# Altium PCB R3I901.PcbDoc
Units mil, origin at the board's own origin, x right, y up, seen from the top; angles counter-clockwise.
Board outline 1978.5 x 1978.5 mil, 2 copper layers (Top Layer, Bottom Layer); 27 components, 25 nets, 102 pads, 31 vias.
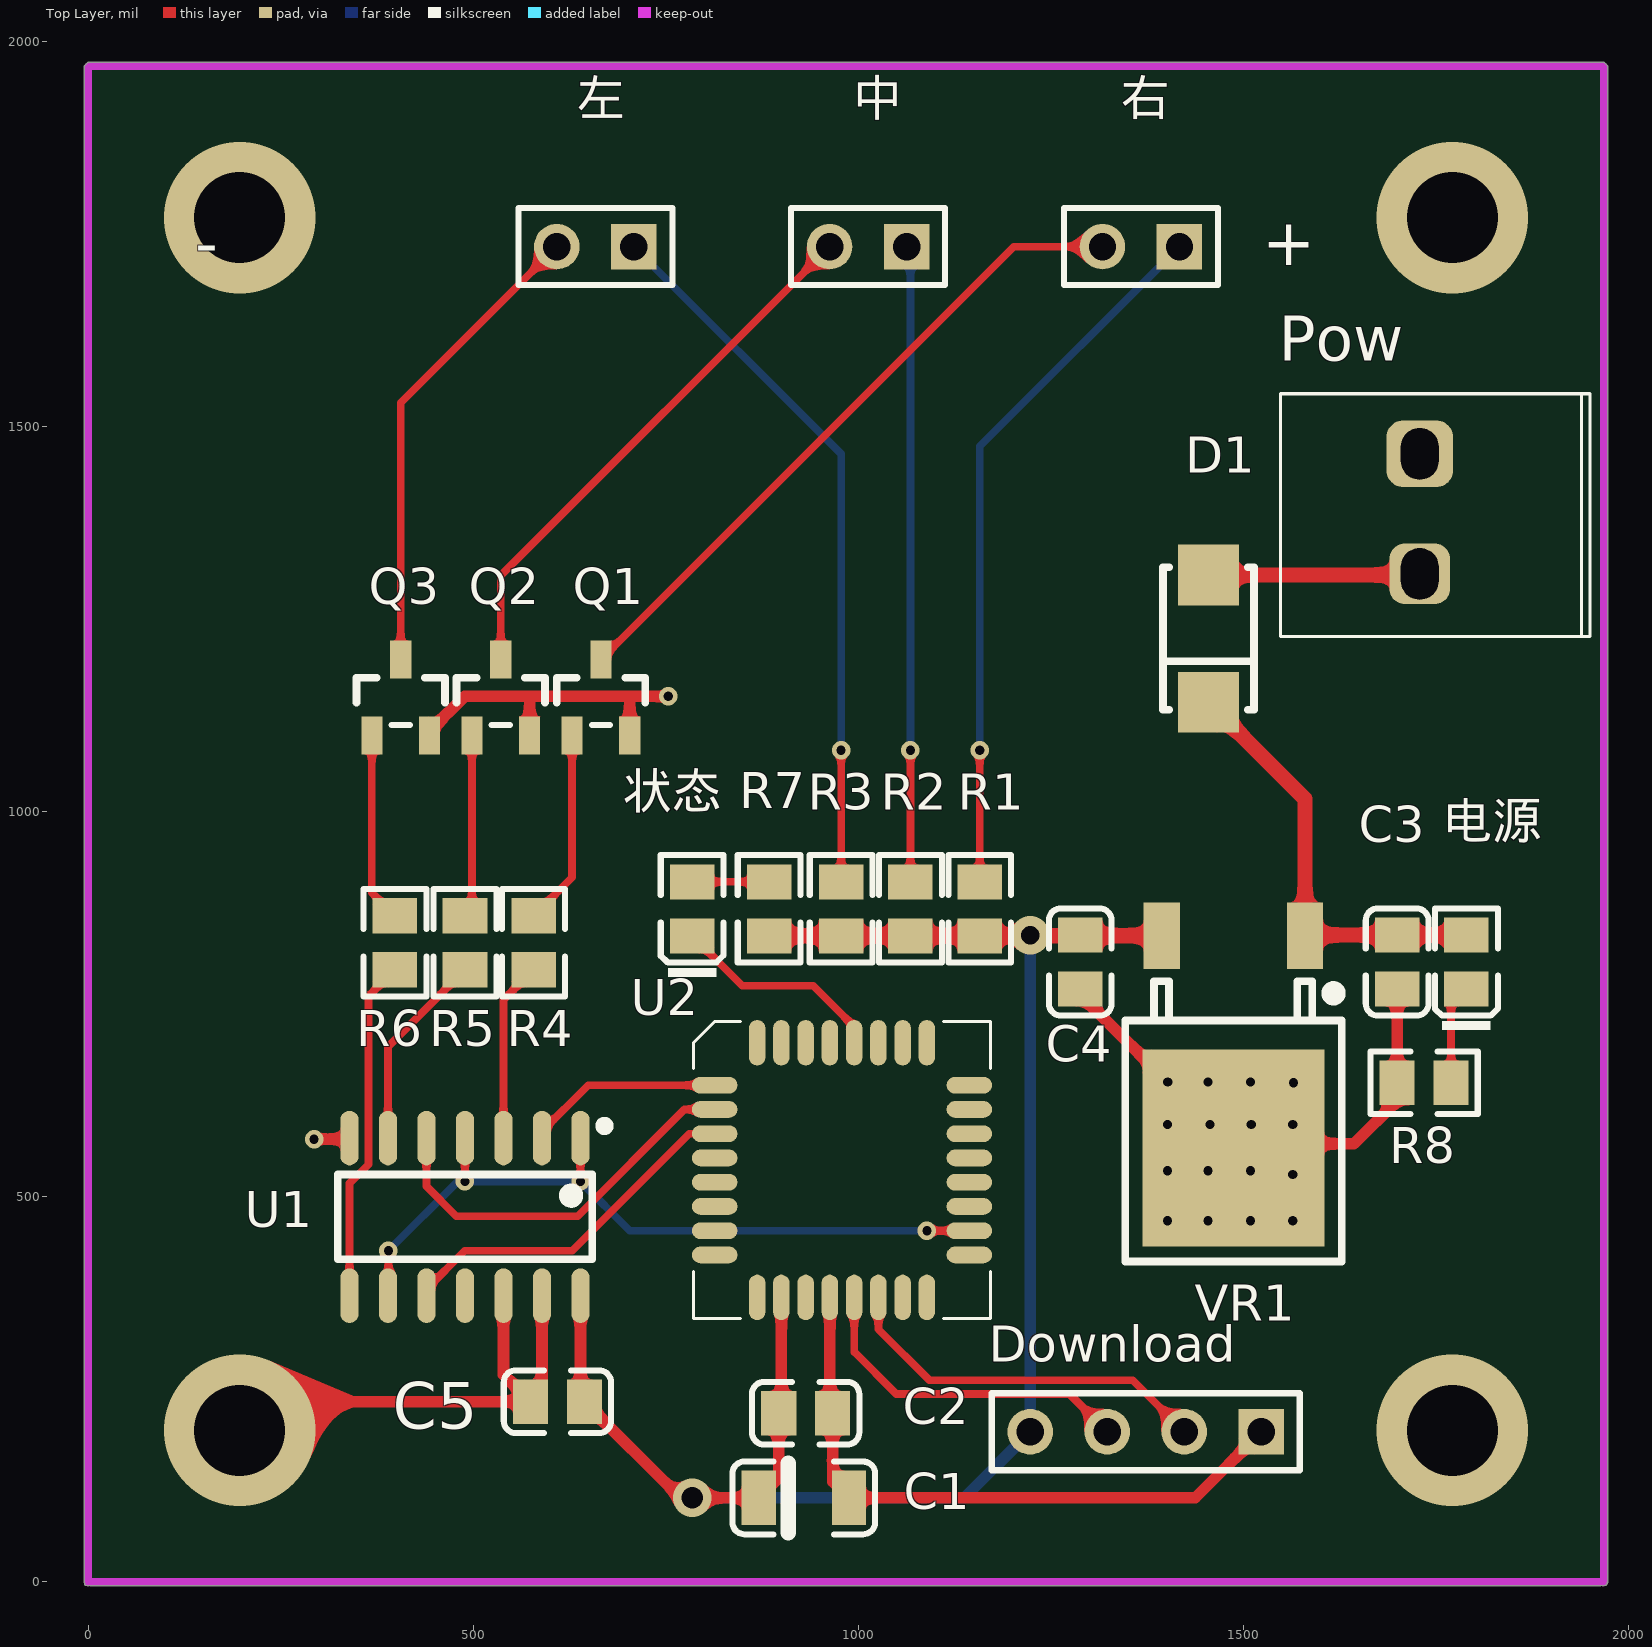
[diagram p0: Top Layer view]
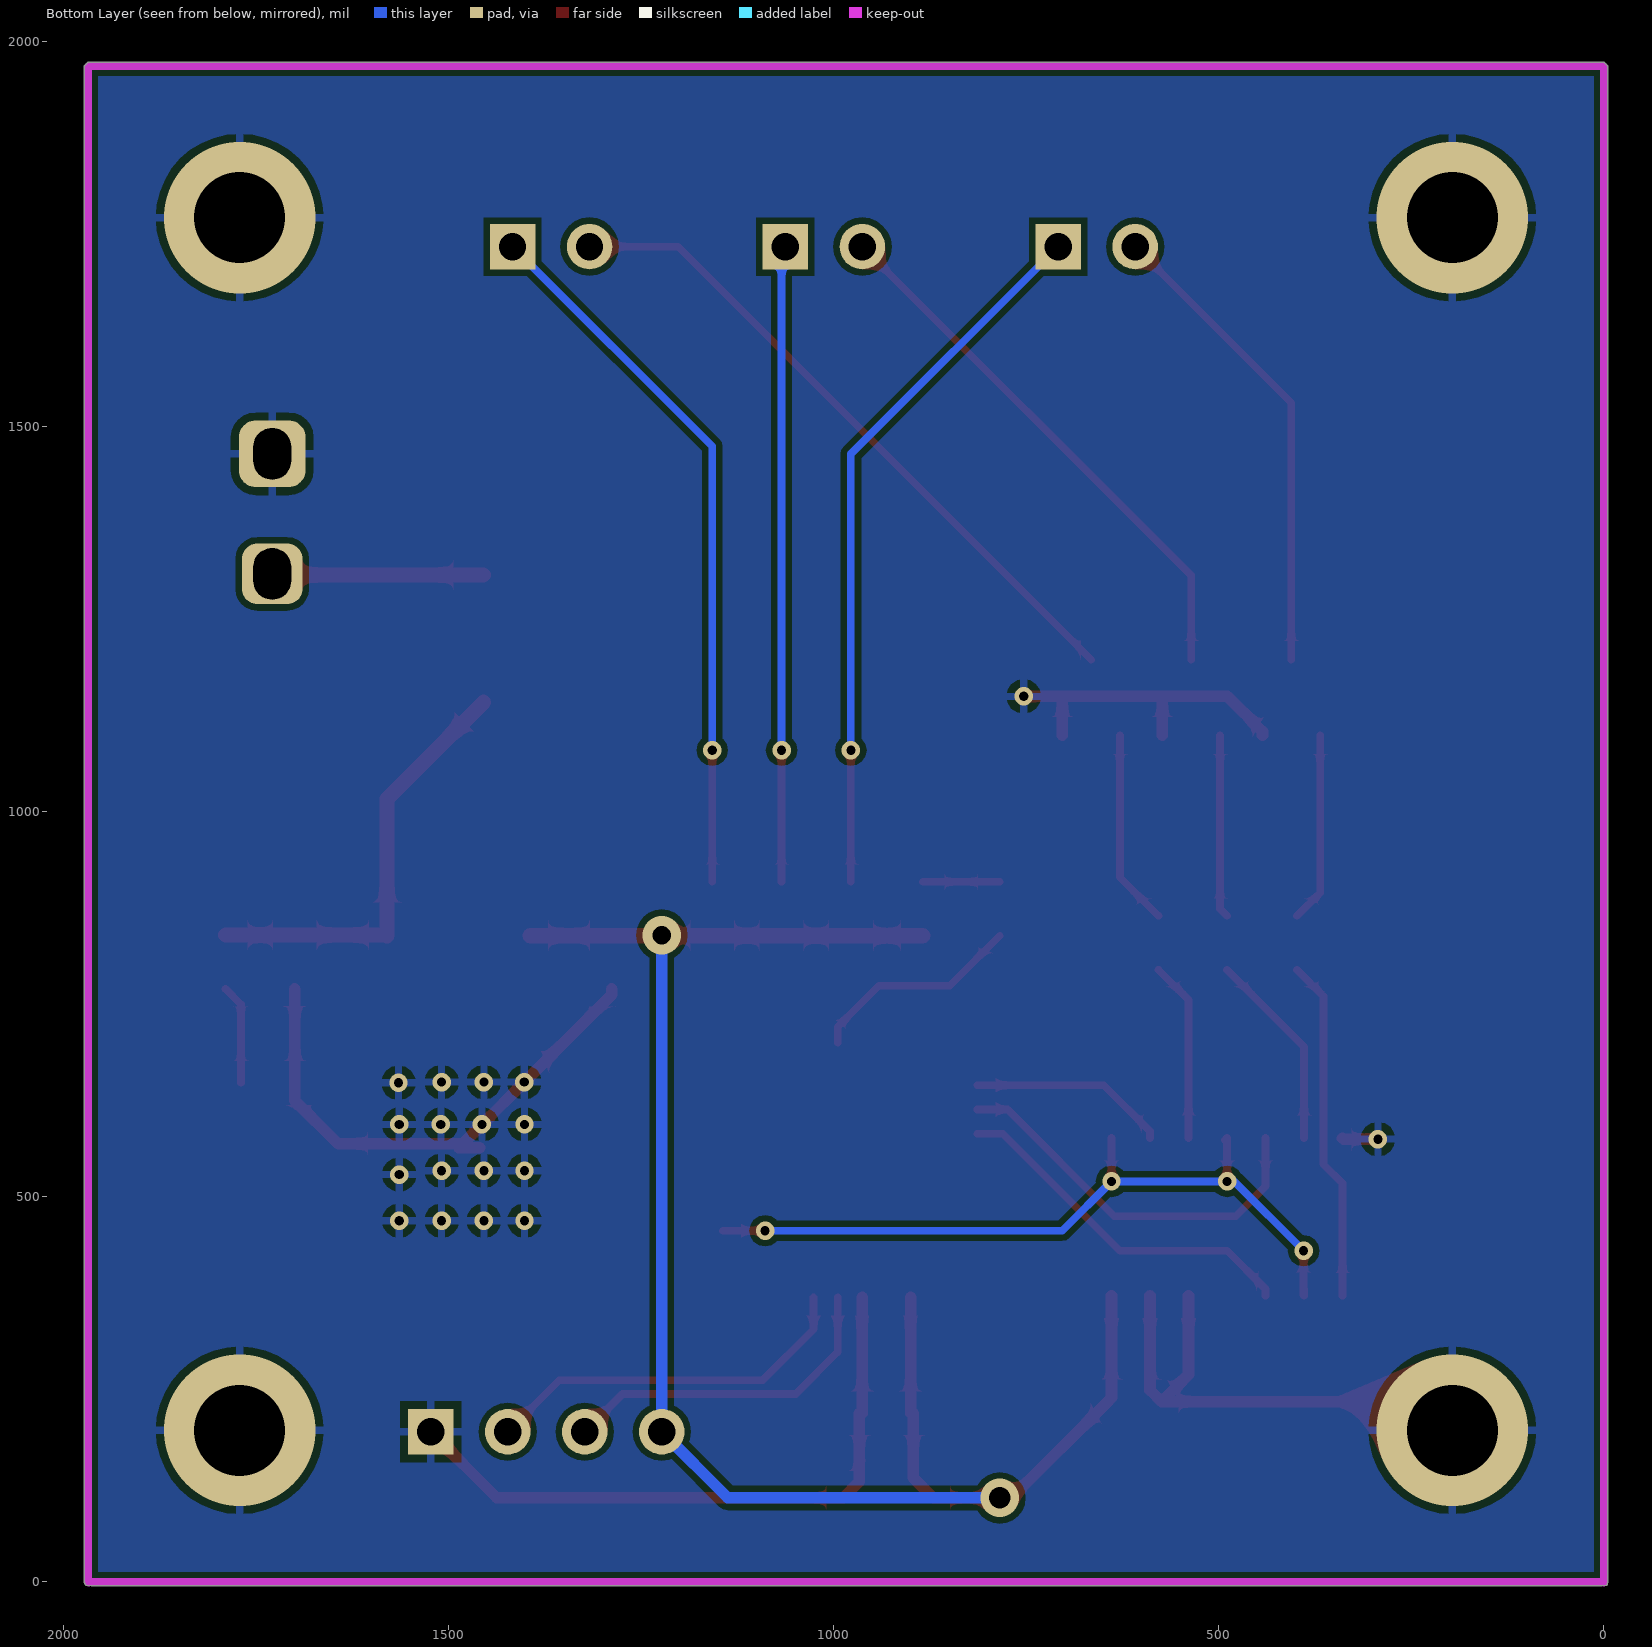
[diagram p1: Bottom Layer view, seen from below]
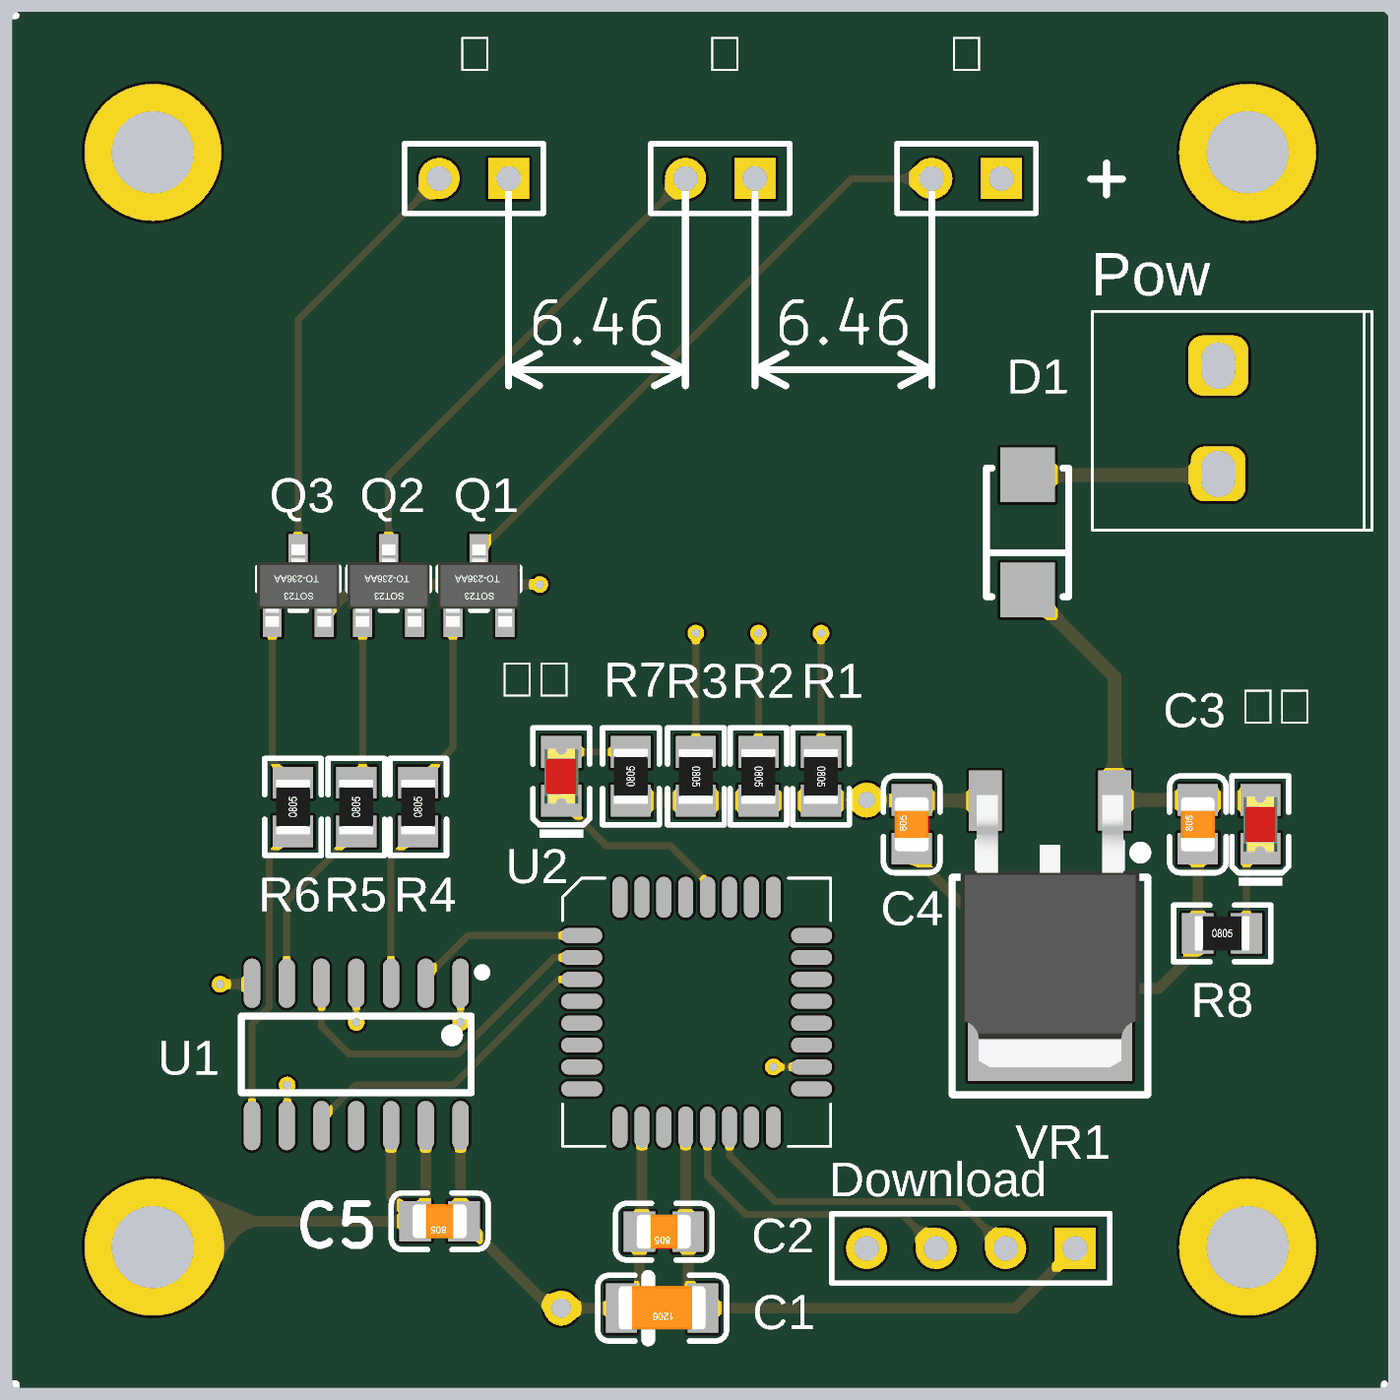
[diagram p2: 3D render of the assembled board from above, using the file's embedded part models]

## Layer stack, top to bottom
Top Solder: solder mask 0.4, Solder Resist, Dk 3.5
Top Layer: signal copper 1.4
Dielectric 1: dielectric 12.6, FR-4, Dk 4.8
Bottom Layer: signal copper 1.4
Bottom Solder: solder mask 0.4, Solder Resist, Dk 3.5

## Board outline
-5,0 -4.98,-0.47 -3.54,-4.48 2.92,-5 1964.64,-5 1971.1,-4.48 1972.02,-3.55 1972.04,-3.54 1973.5,0 1973.5,1968.5 1968.5,1973.5 0,1973.5 -5,1968.5

## Design rules (kind name [scope] priority, off if disabled: settings)
Clearance [All] p1: gap=8 ignorepadtopadclearanceinfootprint=FALSE
PolygonConnect [All] p1: connectstyle=Relief reliefconductorwidth=10 reliefentries=4 polygonreliefangle="90 Angle" airgapwidth=10
RoutingVias [All] p1: holewidth=28 width=50 viastyle="Through Hole" minholewidth=28 minwidth=50 maxholewidth=28 maxwidth=50
SolderMaskExpansion [All] p1: expansion=4
Width [All] p1: maxlimit=20 minlimit=8 preferedwidth=10
30 further rules are at their usual default settings.

## Components (designator, comment, footprint, x,y, rotation, side; value= is the part's Value field where it differs from the comment)
C1 "4.7uF (475) 10% 50V" LC-1206_C 929.45,109.06 r180 top locked
C2 "100nF(104) 10% 50V" LC-0805_C 931.85,219.06 r180 top locked
C3 "330nF (334) 10% 50V" LC-0805_C 1700,805 r90 top
C4 "100nF(104) 10% 50V" LC-0805_C 1288.5,805 r90 top locked
C5 "100nF(104) 10% 50V" LC-0805_C 609.45,234.06 r180 top locked
D1 "SS210" LC-SMA(DO-214AC)_S1 1455,1225 r90 top
Download "Header 4" HDR1X4 1523.5,195 r180 top (schematic designator Download1)
Pow "Header 2" "VH-2A - Circle Hole" 1729.41,1465 r270 top
Q1 "SS8050 Y1" LC-SOT-23(SOT-23-3) 665.94,1148.47 r270 top locked
Q2 "SS8050 Y1" LC-SOT-23(SOT-23-3) 535.94,1148.47 r270 top locked
Q3 "SS8050 Y1" LC-SOT-23(SOT-23-3) 405.94,1148.47 r270 top locked
R1 "100Ω (1000) ±1%" LC-0805_R 1157.91,874.06 r270 top locked
R2 "100Ω (1000) ±1%" LC-0805_R 1067.91,874.06 r270 top locked
R3 "100Ω (1000) ±1%" LC-0805_R 977.91,874.06 r270 top locked
R4 "1KΩ (1001) ±1%" LC-0805_R 578.5,830 r90 top locked
R5 "1KΩ (1001) ±1%" LC-0805_R 489.45,830 r90 top locked
R6 "1KΩ (1001) ±1%" LC-0805_R 398.5,830 r90 top locked
R7 "10KΩ (1002) ±1%" LC-0805_R 884.45,874.06 r90 top locked
R8 "10KΩ (1002) ±1%" LC-0805_R 1735,648.11 r0 top
U1 "74HC08D" LC-SOIC-14_150mil 489.45,474.06 r180 top locked
U2 "STC15F2K60S2_QFP32" LQFP32 813.74,645.04 r0 top locked
VR1 "L78M05ABDT-TR" LC-TO-252-2-180 1487.41,839.22 r270 top locked
中 "Header 2" HDR1X2 1062.99,1734.06 r180 top
右 "Header 2" HDR1X2 1417.32,1734.06 r180 top
左 "Header 2" HDR1X2 708.66,1734.06 r180 top
状态 "翠绿 0805" LC-0805_LED_S1 784.45,874.06 r90 top locked (schematic designator ״̬)
电源 "红灯 0805" LC-0805_LED_S1 1790,805 r90 top

## Footprints (in the part's own frame and the unit in brackets; to place one, negate y for a bottom-side part, rotate by r counter-clockwise, add the part's x,y. Pads: shape width x height; smd on the part's side, far side on the other; paste and mask are expansions set on the pad)
HDR1X2 [mm] "Connector; Header; 2 Position"
  rect 1.5x1.5 hole 0.9: 1(0,0)
  round 1.5 hole 0.9: 2(2.54,0)
  silkscreen extent -1.27,-1.27 3.81,1.27
HDR1X4 [mm] "Connector; Header; 4 Position"
  rect 1.5x1.5 hole 0.9: 1(0,0)
  round 1.5 hole 0.9: 2(2.54,0) 3(5.08,0) 4(7.62,0)
  silkscreen extent -1.27,-1.27 8.89,1.27
LC-0805_C [mm]
  rect 1.16x1.47 smd: 1(-0.89,0) 2(0.89,0)
  silkscreen extent -1.77,-1.04 1.77,1.04, body extent -1,-0.62 1,0.63, height 0.77
LC-0805_LED_S1 [mm]
  rect 1.16x1.47 smd: A(0.89,0) K(-0.89,0)
  silkscreen extent -2.24,-1.03 1.77,1.03, body extent -1.01,-0.62 1.01,0.62, height 1.1
LC-0805_R [mm]
  rect 1.16x1.47 smd: 1(-0.89,0) 2(0.89,0)
  silkscreen extent -1.77,-1.03 1.77,1.04, body extent -1,-0.62 1,0.63, height 0.49
LC-1206_C [mm]
  rect 1.13x1.8 smd: 1(-1.49,0) 2(1.49,0)
  silkscreen extent -2.36,-1.2 2.35,1.2, body extent -1.6,-0.81 1.6,0.79, height 1
LC-SMA(DO-214AC)_S1 [mm]
  rect 2x2 smd: 1(2.1,0) 2(-2.1,0)
  silkscreen extent -2.35,-1.5 2.35,1.5
LC-SOIC-14_150mil [mm]
  oval 0.6x1.8 smd: 1(-3.81,-2.6) 2(-2.54,-2.6) 3(-1.27,-2.6) 4(0,-2.6) 5(1.27,-2.6) 6(2.54,-2.6) 7(3.81,-2.6) 8(3.81,2.6) 9(2.54,2.6) 10(1.27,2.6) 11(0,2.6) 12(-1.27,2.6) 13(-2.54,2.6) 14(-3.81,2.6)
  silkscreen extent -4.75,-3.15 4.2,1.4
LC-SOT-23(SOT-23-3) [mm]
  rect 1.25x0.7 smd: 1(1.25,-0.95) 2(1.25,0.95) 3(-1.25,0)
  silkscreen extent -0.65,-1.46 0.9,1.46, body extent -1.5,-1.5 1.5,1.5, height 1.3
LC-TO-252-2-180 [mm] "180度编带包装"
  rect 2.2x1.2 smd: 1(0,2.361) 3(0.004,-2.361)
  rect 6.5x6 smd: 2(7,0)
  silkscreen extent 1.5,-3.57 10.75,3.57, body extent -0.2,-3.27 9.74,3.27, height 2.44
LQFP32 [mm]
  oval 1.5x0.55 smd: 1(0,0) 2(0,-0.8) 3(0,-1.6) 4(0,-2.4) 5(0,-3.2) 6(0,-4) 7(0,-4.8) 8(0,-5.6) 17(8.4,-5.6) 18(8.4,-4.8) 19(8.4,-4) 20(8.4,-3.2) 21(8.4,-2.4) 22(8.4,-1.6) 23(8.4,-0.8) 24(8.4,0)
  oval 0.55x1.5 smd: 9(1.4,-7) 10(2.2,-7) 11(3,-7) 12(3.8,-7) 13(4.6,-7) 14(5.4,-7) 15(6.2,-7) 16(7,-7) 25(7,1.4) 26(6.2,1.4) 27(5.4,1.4) 28(4.6,1.4) 29(3.8,1.4) 30(3,1.4) 31(2.2,1.4) 32(1.4,1.4)
  silkscreen extent -0.7,-7.7 9.1,2.1
"VH-2A - Circle Hole" [mm] "Header 2 use for Power"
  rrect50% 2.2x2.2 hole 1.24 slot 1.7 at 0 deg: 1(0,0)
  rrect50% 2x2 hole 1.24 slot 1.7 at 0 deg: 2(3.96,0)
  silkscreen extent -1.98,-4.6 6.02,5.61

## Part data
C1: library part "1206 4.7uF (475) 10% 50V", "贴片电容", Package=1206, SuppliersPartNumber=C29823, ComponentLink1Description=供?, ComponentLink1URL=http://www.szlcsc.com/product/details_30577.html, Supplier=LC
C2 C4 C5: library part "0805 100nF(104) 10% 50V", "贴片电容", Package=0805, SuppliersPartNumber=C49678, ComponentLink1Description=供?, ComponentLink1URL=http://www.szlcsc.com/product/details_50686.html, Supplier=LC
C3: library part "0805 330nF (334) 10% 50V", "贴片电容", Package=0805, SuppliersPartNumber=C1740, ComponentLink1Description=供?, ComponentLink1URL=http://www.szlcsc.com/product/details_2092.html, Supplier=LC
D1: library part "SMA(DO-214AC) SS210", "二极管", Package=SMA(DO-214AC), SuppliersPartNumber=C14996, ComponentLink1Description=供?, ComponentLink1URL=http://www.szlcsc.com/product/details_15669.html, Supplier=LC
Download: "Header, 4-Pin", LatestRevisionDate=17-Jul-2002, LatestRevisionNote="Re-released for DXP Platform.", Publisher="Altium Limited"
Pow: "贴片2p座"
Q1 Q2 Q3: library part "SOT-23 SS8050 Y1", "三极管", Package=SOT-23, SuppliersPartNumber=C2150, ComponentLink1Description=供?, ComponentLink1URL=http://www.szlcsc.com/product/details_2507.html, Supplier=LC
R1 R2 R3: library part "0805 100Ω (1000) 1%", "贴片电阻", Package=0805, SuppliersPartNumber=C17408, ComponentLink1Description=供?, ComponentLink1URL=http://www.szlcsc.com/product/details_18096.html, Supplier=LC
R4 R5 R6: library part "0805 1KΩ (1001) 1%", "贴片电阻", Package=0805, SuppliersPartNumber=C17513, ComponentLink1Description=供?, ComponentLink1URL=http://www.szlcsc.com/product/details_18201.html, Supplier=LC
R7 R8: library part "0805 10KΩ (1002) 1%", "贴片电阻", Package=0805, SuppliersPartNumber=C17414, ComponentLink1Description=供?, ComponentLink1URL=http://www.szlcsc.com/product/details_18102.html, Supplier=LC
U1: "74系列逻辑芯片", Package=SOIC-16_150mil, SuppliersPartNumber=C5602, ComponentLink1Description=供?, ComponentLink1URL=http://www.szlcsc.com/product/details_6053.html, Supplier=LC
VR1: library part "TO-252-2 L78M05ABDT-TR", "低压差线性稳压(LDO)", Package=TO-252-2, SuppliersPartNumber=C58069, ComponentLink1Description=供?, ComponentLink1URL=http://www.szlcsc.com/product/details_59107.html, Supplier=LC
中 右 左: "Header, 2-Pin", LatestRevisionDate=17-Jul-2002, LatestRevisionNote="Re-released for DXP Platform.", Publisher="Altium Limited"
状态: library part "0805 翠绿", "发光二极管", Package=0805, SuppliersPartNumber=C2297, ComponentLink1Description=供?, ComponentLink1URL=http://www.szlcsc.com/product/details_2670.html, Supplier=LC
电源: library part "0805 红灯", "发光二极管", Package=0805, SuppliersPartNumber=C2295, ComponentLink1Description=供?, ComponentLink1URL=http://www.szlcsc.com/product/details_2668.html, Supplier=LC

## Via types
v1: diameter 24, hole 12, Top Layer to Bottom Layer, 25 vias
v2: diameter 196.85, hole 118.11, Top Layer to Bottom Layer, 4 vias
v3: diameter 50, hole 24, Top Layer to Bottom Layer, 1 vias
v4: diameter 50, hole 28, Top Layer to Bottom Layer, 1 vias

## Nets (pads, with @x,y where several pads share a name; then routed paths per layer and width w, separated by ;. In a path a pad name is that pad's centre, name@x,y a point inside that pad or via, vN(x,y) a via of type N, cw(c..) or ccw(c..) an arc to the next point about the centre after c; other vN are vias at no path point)
38K: U1.1 U1.4 U1.9 U2.18 | length 1002.5
  Top Layer w10: U1.9@389.45,380.4 U1.9 390,372.25 v1(390,430) ; v1(489.45,520) U1.4 U1.4@492.44,573.43 ; v1(639.45,520) U1.1 ; v1(1089.33,456.06) U2.18
  Bottom Layer w10: v1(390,430) 480,520 v1(489.45,520) v1(639.45,520) 703.38,456.06 v1(1089.33,456.06)
+5: C1.2 C2.2 C4.2 C5.1 Download.4 R1.2 R2.2 R3.2 R7.1 U1.14 U2.10 VR1.3 | length 2318.7
  Top Layer w15: U1.14 639.45,239.1 C5.1 769.49,109.06 v4(784.45,109.06) C1.2 896.81,135.08 C2.2 ; C2.2@900.35,219.06 U2.10
  Top Layer w20: R7.1 884.53,839.1 1254.45,839.1 ; 1254.45,839.22 1394.28,839.22 VR1.3
  Bottom Layer w15: v4(784.45,109.06) 1137.56,109.06 Download.4 v3(1223.5,840)
+12: C3.2 D1.2 VR1.1 电源.A | length 565
  Top Layer w20: D1.2 1580.38,1016.95 VR1.1 1581.2,840.04 C3.2 电源.A
GND: C1.1 C2.1 C3.1 C4.1 C5.2 Download.1 Pow.1 Q1.2 Q2.2 Q3.2 R8.1 U1.7 U1.12 U1.13 U2.12 VR1.2 | length 2717.9
  Top Layer w10: VR1.2@1481.99,569.05 VR1.2@1487.41,569.05
  Top Layer w15: v2(196.85,196.85) 234.06,234.06 C5.2 ; v1(293.5,575) 338.03,575 U1.7 ; Q3.2 443.35,1104.36 488.98,1150 578.5,1150 ; U1.12 539.45,269.02 C5.2 ; Q2.2 573.35,1144.84 578.5,1150 ; U1.13 589.45,249.1 C5.2 ; Q1.2 703.35,1145.16 698.5,1150 ; v1(753.5,1150) 698.5,1150 ; C2.1@963.35,219.06 U2.12 ; C2.1 966.89,130.28 C1.1 1437.56,109.06 Download.1 ; C4.1 1288.5,762.54 v1(1401.99,649.06) v1(1456.99,594.06) 1481.99,569.05 VR1.2 VR1.2@1459.83,563.63 ; VR1.2@1487.41,569.05 1643.94,568.98 1700,625.04 1700,715 C3.1 ; 578.5,1150 698.5,1150
  other v1: 1401.77,469.06 1454.45,469.06 1509.45,469.06 1564.45,469.06 1564.45,529.06 1401.77,534.06 1454.45,534.06 1509.45,534.06 1401.77,594.06 1510.39,594.06 1564.45,594.06 1565.39,648.11 1454.45,649.06 1509.45,649.06
  other v2: 1771.65,196.85 196.85,1771.65 1771.65,1771.65
Left: U1.2 U2.1 | length 257.8
  Top Layer w10: U1.2 589.45,585.13 649.36,645.04 U2.1
Middle: U1.5 U2.2 | length 510.3
  Top Layer w10: U1.5 439.45,513.9 478.35,475 635.94,475 774.49,613.54 U2.2
NetD1_1: D1.1 Pow.2 | length 292.6
  Top Layer w20: D1.1 1727.99,1307.68 Pow.2 Pow.2@1711.81,1309.09
NetQ1_1: Q1.1 R4.2 | length 254.9
  Top Layer w10: R4.2 628.54,915.08 Q1.1
NetQ1_3: Q1.3 右.2 | length 873.6
  Top Layer w10: Q1.3 1202.32,1734.06 右.2
NetQ2_1: Q2.1 R5.2 | length 238
  Top Layer w10: R5.2 498.54,874.13 Q2.1
NetQ2_3: Q2.3 中.2 | length 713.3
  Top Layer w10: Q2.3 535.94,1307.01 中.2
NetQ3_1: Q3.1 R6.2 | length 246.6
  Top Layer w10: Q3.1 368.54,895 R6.2
NetQ3_3: Q3.3 左.2 | length 620.3
  Top Layer w10: Q3.3 405.94,1531.34 左.2
NetR1_1: R1.1 右.1 | length 932.4
  Top Layer w10: R1.1 v1(1157.91,1080)
  Bottom Layer w10: v1(1157.91,1080) 1157.91,1474.65 右.1
NetR2_1: R2.1 中.1 | length 827
  Top Layer w10: R2.1 v1(1067.91,1080)
  Bottom Layer w10: 中.1 1067.91,1729.13 v1(1067.91,1080)
NetR3_1: R3.1 左.1 | length 936.5
  Top Layer w10: R3.1 v1(977.91,1080)
  Bottom Layer w10: 左.1 977.91,1464.8 v1(977.91,1080)
NetR4_1: R4.1 U1.3 | length 234.7
  Top Layer w10: U1.3 539.45,755.9 R4.1
NetR5_1: R5.1 U1.6 | length 260
  Top Layer w10: U1.6 389.45,694.96 R5.1
NetR6_1: R6.1 U1.8 | length 447.7
  Top Layer w10: U1.8 339.45,517.71 364.26,542.52 364.26,760.72 R6.1
NetR7_2: R7.2 状态.A | length 100
  Top Layer w10: 状态.A R7.2
NetR8_2: R8.2 电源.K | length 130.1
  Top Layer w10: R8.2 1770.04,750 电源.K
NetU2_28: U2.28 状态.K | length 280.2
  Top Layer w10: 状态.K 849.41,774.06 941.84,774.06 994.84,721.06 U2.28
Right: U1.10 U2.3 | length 466.5
  Top Layer w10: U1.10 439.45,380.4 489.04,430 628.5,430 780.55,582.05 U2.3
RX: Download.3 U2.13 | length 442.4
  Top Layer w10: U2.13 994.84,298.66 1049.45,244.06 1274.45,244.06 Download.3
TX: Download.2 U2.14 | length 493.5
  Top Layer w10: U2.14 1026.34,328.37 1092.65,262.06 1356.45,262.06 Download.2
pads on no net: U1.11 U2.4 U2.5 U2.6 U2.7 U2.8 U2.9 U2.11 U2.15 U2.16 U2.17 U2.19 U2.20 U2.21 U2.22 U2.23 U2.24 U2.25 U2.26 U2.27 U2.29 U2.30 U2.31 U2.32

## Polygon pours and split planes (outlines as drawn)
GND on Bottom Layer "Bottom Layer-GND" (solid, pour order 4): 0,1967.56 1968.5,1967.56 1968.5,0 1969.45,-0.94 0,-0.94

## Keep-outs
Keep-Out Layer:
  lines w10: 1967.56,-0.94 1968.5,0 ; 1968.5,0 0,0 0,1968.5 1968.5,1968.5 1968.5,0 ; 0,-0.94 0,-0.94

## Silkscreen, mask and mechanical layers (free items; w line width, h text height)
Top Overlay:
  lines w20: 909.45,64.06 909.45,154.06
  text "+" at 1525,1710 h60
  text "-" at 139.45,1709.06 h60

## Dimensions
0,0 to 0,1968.5 on Top Overlay
0,0 to 1968.5,0 on Top Overlay
962.99,1734.06 to 708.66,1734.06 on Top Overlay
1062.99,1734.06 to 1317.32,1734.06 on Top Overlay